# Altium PCB ESP32P4 SOM.PcbDoc (part 2 of 4)
Units mm, origin at the board's own origin, x right, y up, seen from the top; angles counter-clockwise.
Board outline 86.37 x 63.05 mm, 4 copper layers (L1-TOP, L2-GND, L3-GND/PWR, L4-BOT), stack 1.57 mm thick; 203 components, 172 nets, 736 pads, 1001 vias.
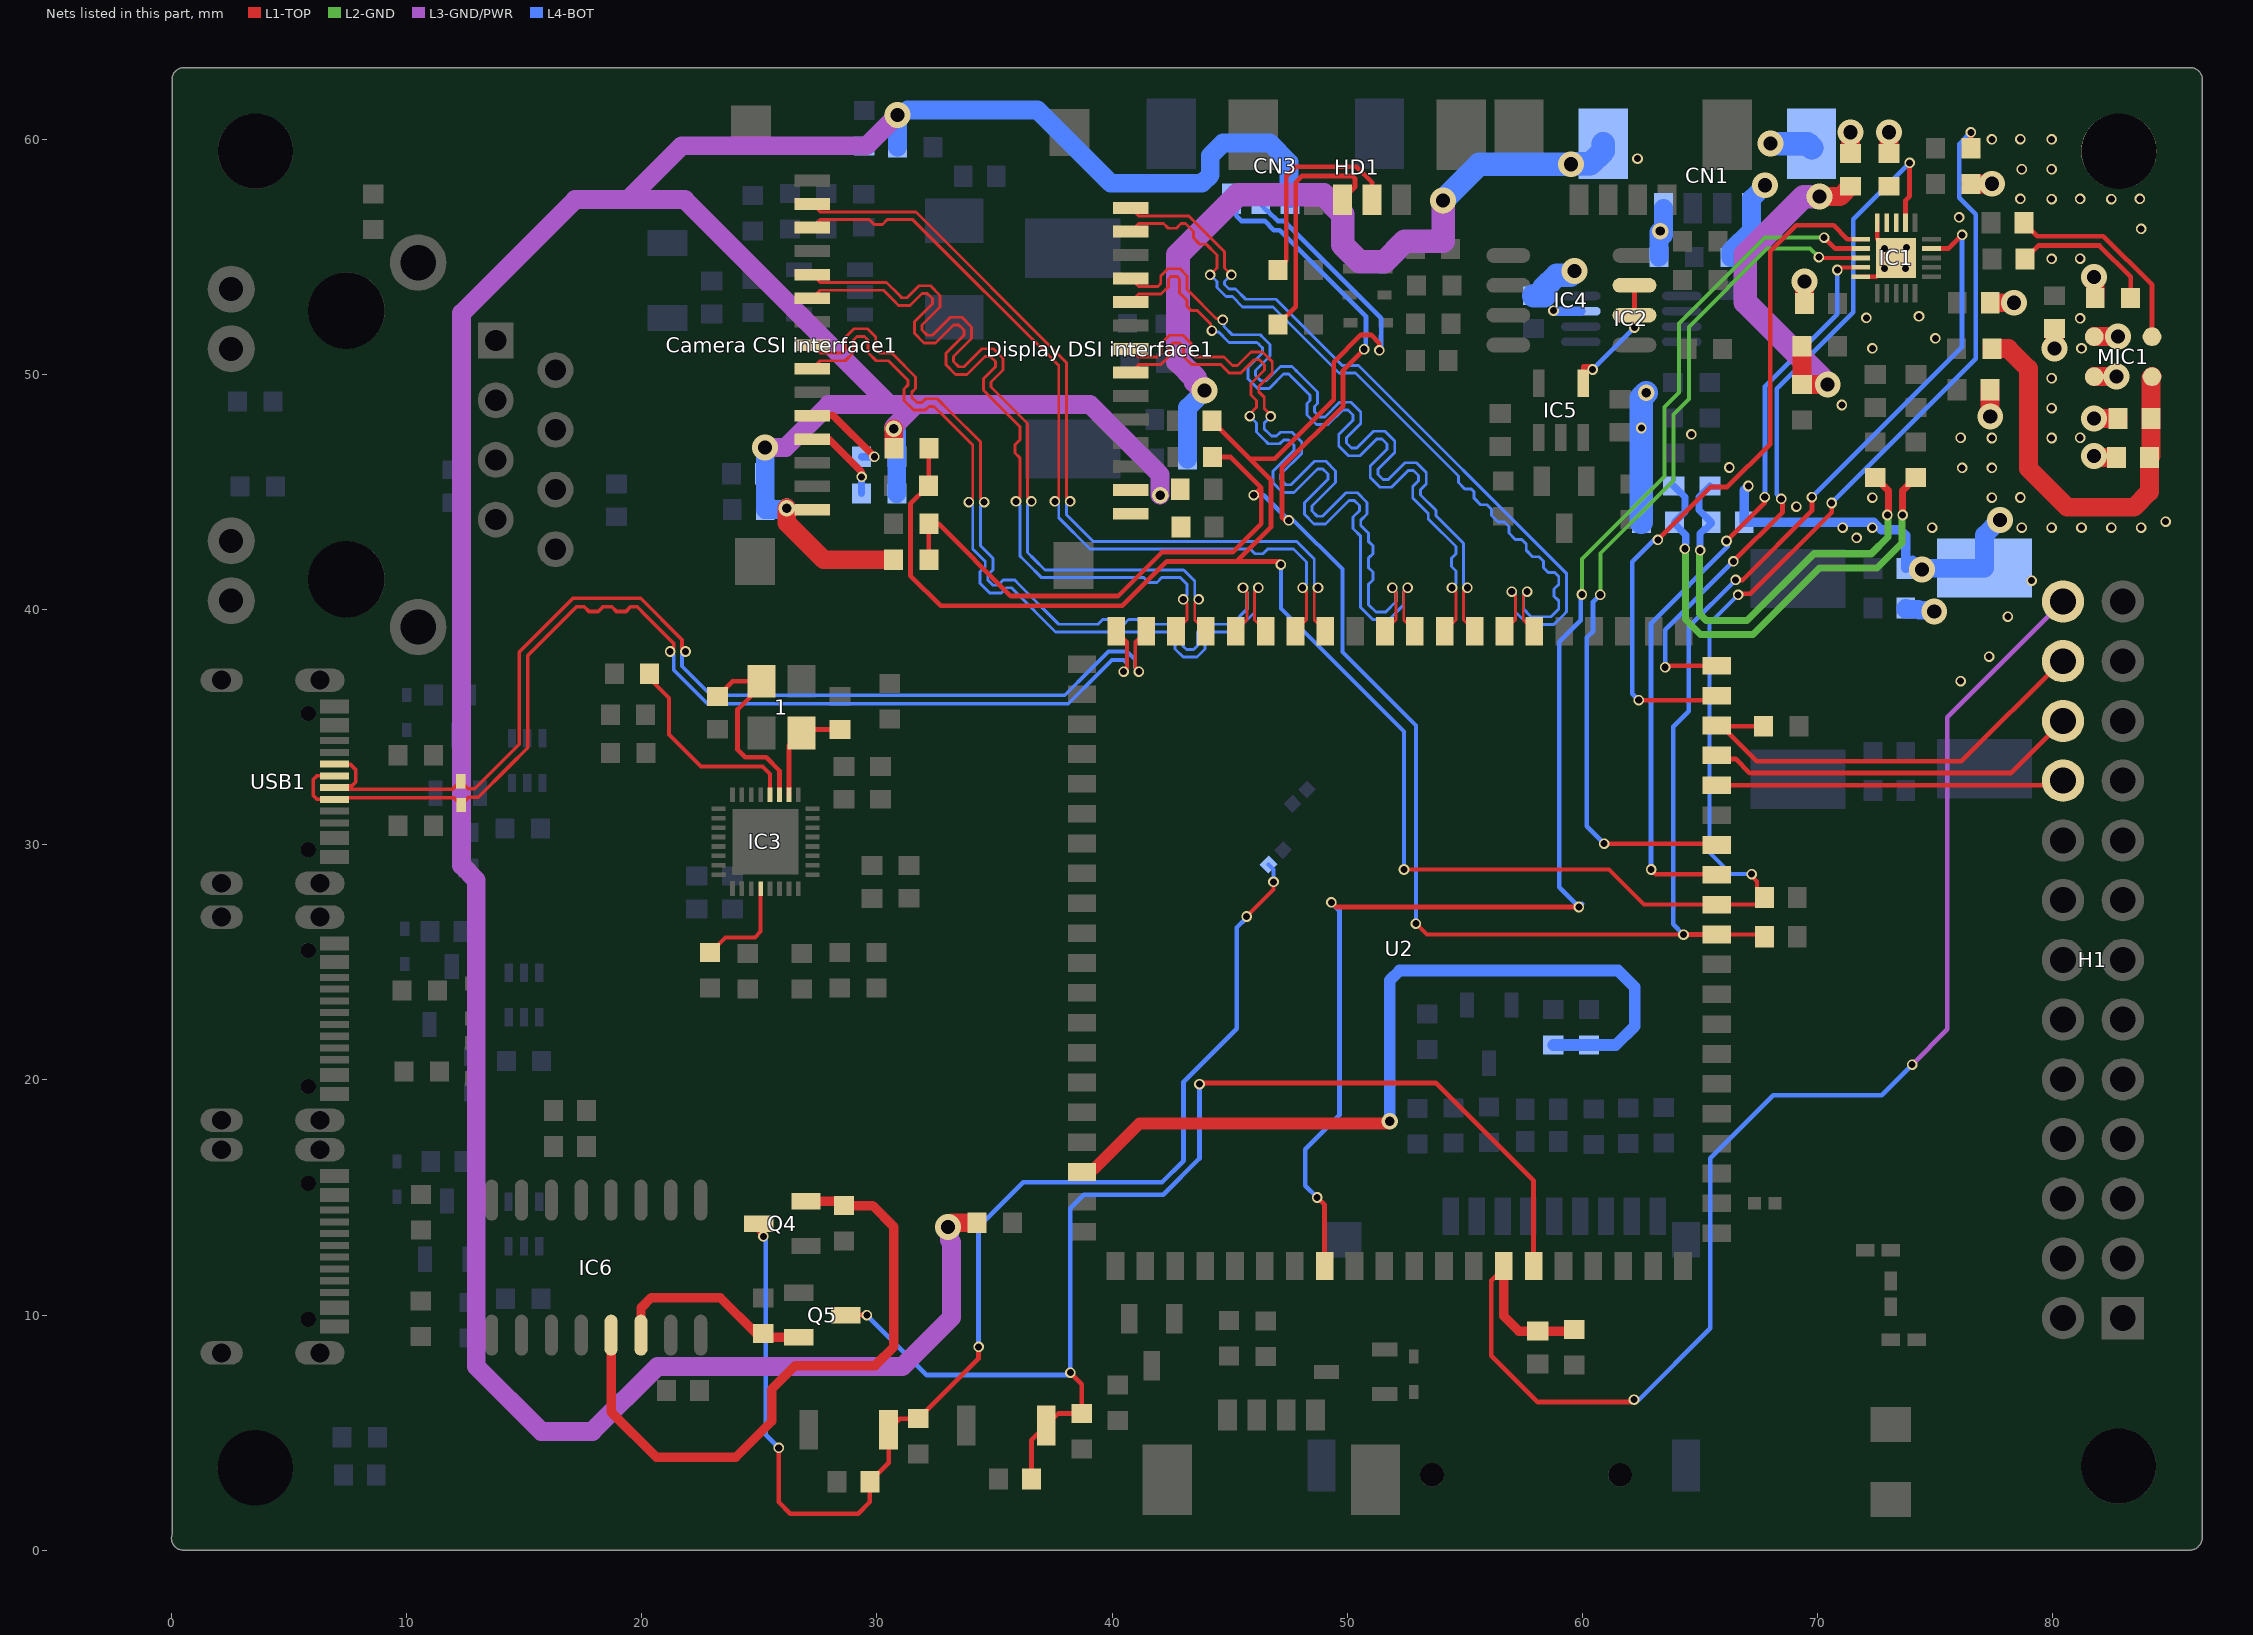
[diagram p4: the nets of this part, all layers, seen from the top]

## Part data
1: library part X322525MOB4SI
ANT1: library part "kinghelm KH-3216-A35", "Ceramic Antenna 5.19dBi 100MHz 2.45GHz 1206 RF Antennas RoHS"
C1 C5: library part CL10A106KP8NNNC, "10V 10uF X5R ±10% 0603 Ceramic Capacitors ROHS"
C2 C15 C17 C36 C37 C49 C50: library part CL10C220JB8NNNC, "50V 22pF C0G ±5% 0603 Ceramic Capacitors RoHS"
C3 C6 C8 C13 C18 C23 C25 C28 C31 C32 C34 C38 C39 C41 C43 C45 C48 C51 C52 C53 C54 C55 C57: library part CC0603KRX7R9BB104, "50V 100nF X7R ±10% 0603 Ceramic Capacitors ROHS"
C4 C9 C11 C24 C29 C30 C33 C35 C40 C42 C44 C56: library part CL10A106MA8NRNC, "25V 10uF X5R ±20% 0603 Ceramic Capacitors ROHS"
C7: library part CL10B102KB8NNNC, "50V 1nF X7R ±10% 0603 Ceramic Capacitors ROHS"
C10 C12 C14 C16 C19 C20 C21 C22 C26 C27 C47 C58 C59 C60: library part CL10B105KA8NNNC, "25V 1uF X7R ±10% 0603 Ceramic Capacitors ROHS"
C46 C61: library part FCC0603N1R0C500CT, "50V 1pF C0G 0603 Ceramic Capacitors RoHS"
"Camera CSI interface1" "Display DSI interface1": library part FPC-1.0FX-15PWCR-H20, "-25℃~+85℃ Hinged Lid 15P 1mm 500mA 50V Bottom Contact Surface Mount, Right Angle SMD,P=1mm,Surface Mount,Right Angle FFC, FPC (Flat Flexible) Connector Assemblies RoHS"
CN1 CN2 CN3 HD1 ZJP1: "4P PicoBlade(MX 1.25) 1x4P Tin -40℃~+105℃ White 1.25mm 125V 4 1A 1 Surface Mount,Vertical SMD,P=1.25mm Headers, Male Pins RoHS"
D1: library part BAT54C_C916424, "600mA 30V 1 Pair Common Cathode 1V@100mA 200mA SOT-23 Single Diodes RoHS"
D2 D3 D4 D5 D6 D7 D8 D9 D11 D12 D13: library part LESD5D5.0CT1G, "9.4A@8/20us 18.6V 7.8V 5V SOD-523 TVS Diodes RoHS"
D10: library part ZMM5V6_C707195, "Zener Diode Independent 5.6V 500mW Surface Mount LL-34"
F1 F2 F3: library part HI3312X101R-10, "4mΩ 100Ω@100MHz SMD,8.5x3.1mm Ferrite Beads and Chips ROHS"
F4 F5: library part 0603-010-24V, "24V 100mA 40A 300mA 900mΩ 0603 PTC Resettable Fuses RoHS"
H1: library part "HX PZ2.54-2X13P ZZ", "26P 2x13P Gold Copper Alloy -40℃~+105℃ Pin Header Black 2.54mm 2.5mm 6mm 1kV 3mm 3A 2 Through Hole 2.54mm Through Hole,P=2.54mm Headers, Male Pins RoHS"
Hole1 Hole2 Hole3 Hole4: library part Pad_Big
IC1: library part ES8311, "1.8V~3.3V QFN-20-EP(3x3) Signal Switches, Multiplexers, Decoders RoHS"
IC2: library part NS4150, "4mA 1-Channel 3Wx1@4Ω Class D MSOP-8 Audio Amplifiers RoHS"
IC3: library part IP101GRI, "Ethernet Transceiver 3.3V QFN-32-EP(4x4) Drivers, Receivers, Transceivers RoHS"
IC4: library part MAX485ESA+T_C41365333, "Transceiver 4.75V~5.25V SOIC-8 Drivers, Receivers, Transceivers RoHS"
IC5: library part TP74LVC1G132S5, "5ns@5V,50pF 10uA 1.65V~5.5V NAND Gate SOT-23-5 Gates and Inverters RoHS"
IC6: library part CH340C, "Transceiver USB 2.0 SOP-16 Interface Controllers RoHS"
L1: library part APH0530T2R2M, "7A 2.2uH Molded Inductor ±20% 7A 29mΩ SMD,5.4x5.2mm Fixed Inductors RoHS"
L2: library part MQG06HF2N2JT7, "700mA 2.2nH ±5% Wirewound Chip Inductor 80mΩ 0603 Fixed Inductors RoHS"
LED1: "20mA 2.3V Red 50mW 0603 LED Indication - Discrete ROHS"
MIC1: "OCLGA-4(3x3.8) MEMS Microphones ROHS"
Q1 Q2 Q6 Q7 Q8: library part AO3407A, "30V 4.3A 48mΩ@10V 2.5V@250uA 1 P-Channel SOT-23 Single FETs, MOSFETs ROHS"
Q3: library part SS8550_C7420371, "300mW 25V 1.5A PNP SOT-23 Single Bipolar Transistors RoHS"
Q4 Q5: library part S8050_C2828466, "300mW 25V 500mA NPN SOT-23 Single Bipolar Transistors RoHS"
Q9 Q10 Q11: library part LMBT3906DW1T1, "40V 150mW 200mA PNP SOT-363 Single Bipolar Transistors RoHS"
R1 R19 R39 R40: library part "RMC 0603 1K J N", "100mW 1kΩ 50V ±100ppm/℃ Thick Film Resistor ±5% 0603 Chip Resistor - Surface Mount ROHS"
R2 R7 R13 R26 R29 R30 R50 R51 R52 R53 R55 R63 R67 R69 R71 R73 R75: library part RC0603FR-0710KL, "100mW 10kΩ 75V ±100ppm/℃ Thick Film Resistor ±1% 0603 Chip Resistor - Surface Mount ROHS"
R3: library part RC0603FR-07100KL, "100mW 100kΩ 75V ±100ppm/℃ Thick Film Resistor ±1% 0603 Chip Resistor - Surface Mount ROHS"
R4 R6 R8: library part RC0603FR-0722KL, "100mW 22kΩ 75V ±100ppm/℃ Thick Film Resistor ±1% 0603 Chip Resistor - Surface Mount RoHS"
R5 R9 R11 R12 R14 R15 R16 R17 R18 R20 R23 R32 R34 R35 R36 R37 R49 R56 R59 R62 R77 R78: library part RC0603JR-070RL, "100mW 0Ω 75V Thick Film Resistor ±5% 0603 Chip Resistor - Surface Mount RoHS"
R10: library part RC0603FR-07100RL, "100mW 100Ω 75V ±100ppm/℃ Thick Film Resistor ±1% 0603 Chip Resistor - Surface Mount ROHS"
R21 R22 R24 R25 R27 R28 R41 R42 R43 R44 R45 R46 R48 R54 R57 R58 R60 R61 R64 R68 R70: library part FRC0603F5101TS, "100mW 5.1kΩ 75V ±100ppm/℃ Thick Film Resistor ±1% 0603 Chip Resistor - Surface Mount RoHS"
R31 R33 R65 R66: library part RC0603FR-072K2L, "100mW 2.2kΩ 75V ±100ppm/℃ Thick Film Resistor ±1% 0603 Chip Resistor - Surface Mount RoHS"
R38: library part RC0603FR-071K5L, "100mW 1.5kΩ 75V ±100ppm/℃ Thick Film Resistor ±1% 0603 Chip Resistor - Surface Mount RoHS"
R47: library part AC0603FR-076K19L, "6.19kΩ 100mW 75V ±100ppm/℃ Thick Film Resistor ±1% 0603 Chip Resistor - Surface Mount RoHS"
R72 R74 R76: library part RC0603FR-07100KL_1RC0603FR-0751KL, "100mW 51kΩ 75V ±100ppm/℃ Thick Film Resistor ±1% 0603 Chip Resistor - Surface Mount RoHS"
R79 R80: library part RC0603FR-071ML, "100mW 1MΩ 75V Thick Film Resistor ±100ppm/℃ ±1% 0603 Chip Resistor - Surface Mount RoHS"
SS: library part HR913550A, "1 With LED Through Hole Modular/Ethernet Connector Jacks With Magnetics RoHS"
SW1 SW2: "12V 2.5mm Round Button 3mm SPST 50mA SMD,3x2.5mm Tactile Switches ROHS"
TF1: library part SH-TF-01A, "-25℃~+85℃ Push-Push 2mm Connector and Ejector MicroSD Card (TF Card) SMD PC Card Sockets RoHS"
U1: "1.5MHz 2A Buck Adjustable 600mV~5.5V 1 SOT-23-5 Voltage Regulators - DC DC Switching Regulators RoHS"
U2: library part JC-ESP32P4-M3
USB1 USB2 USB3: library part GT-USB-7010ASV, "USB 2.0 1 16P -40℃~+85℃ Type-C SMD USB, DVI, HDMI Connector Assemblies RoHS"

## Via types
v1: diameter 0.45, hole 0.3, L1-TOP to L4-BOT, tented both sides, 789 vias
v2: diameter 0.7, hole 0.4, L1-TOP to L4-BOT, tented both sides, 101 vias
v3: diameter 1.1, hole 0.6, L1-TOP to L4-BOT, tented both sides, 75 vias
v4: diameter 0.45, hole 0.3, L1-TOP to L4-BOT, 33 vias
v5: diameter 0.4, hole 0.3, L1-TOP to L4-BOT, tented both sides, 2 vias
v6: diameter 1.1, hole 0.6, L1-TOP to L4-BOT, 1 vias

## Nets (pads, with @x,y where several pads share a name; then routed paths per layer and width w, separated by ;. In a path a pad name is that pad's centre, name@x,y a point inside that pad or via, vN(x,y) a via of type N, cw(c..) or ccw(c..) an arc to the next point about the centre after c; other vN are vias at no path point)
25M_XI: 1.3 C36.1 IC3.2 | length 4.5
  L1-TOP w0.2: IC3.2@26.259,32.129 26.259,34.221 1.3@26.792,34.753 ; 1.3@26.944,34.906 C36.1@28.43,34.906
  L1-TOP w0.204: 1.3@26.792,34.753 1.3@26.944,34.906
25M_XO: 1.1 C37.1 IC3.3 | length 8.6
  L1-TOP w0.2: 1.1@25.092,36.953 25.092,36.769 24.076,35.754 24.076,34.044 24.403,33.717 25.292,33.717 25.859,33.15 IC3.3@25.859,32.129
  L1-TOP w0.204: C37.1@23.219,36.311 23.861,36.953 1.1@25.092,36.953
ADC_MIC1_N: C14.1 R15.2 | length 6.2
  L1-TOP w0.2: C14.1@78.826,54.913 79.395,55.482 81.992,55.482 83.321,54.153 R15.2@83.321,53.255
ADC_MIC1_P: C12.2 MIC1.4 | length 8.7
  L1-TOP w0.2: C12.2@78.783,56.451 79.352,55.882 82.158,55.882 84.229,53.81 MIC1.4@84.229,51.61
ADC_MICBIAS12: C28.2 C29.2 MIC1.1 R9.2 | length 17.2
  L1-TOP w0.8: R9.2@77.419,51.1 78.124,51.1 78.972,50.252 78.972,46.004 80.62,44.356 83.468,44.356 84.118,45.006 C29.2@84.118,46.469 84.186,46.537 C28.2@84.186,48.125 84.186,49.867 MIC1.1@84.229,49.91
AGND: C1.1 C3.1 C10.2 C11.1 C15.1 C16.1 C17.2 C19.1 C20.1 C23.1 C24.1 C25.1 C26.1 C27.2 C28.1 C29.1 CN1.1 CN1.4 CN1.5 CN1.6 F2.2 Hole3.1 IC1.5 IC1.10 IC1.21 IC2.7 MIC1.2 MIC1.3 R7.1 R13.1 R15.1 | length 82.2
  L1-TOP w0.2: IC1.10@71.846,54.155 72.492,54.155 v4(72.85,54.513) ; IC1.5@72.546,56.455 72.546,55.755 IC1.21@72.898,55.404 ; v4(72.85,55.355) 72.946,55.355 IC1.21@73.346,54.955
  L1-TOP w0.8: C27.2@69.453,53.019 v3(69.453,53.958) ; C23.1@71.4,59.402 v3(71.4,60.304) ; C24.1@73.046,59.402 v3(73.046,60.304) ; R7.1@76.528,58.102 77.418,58.102 v3(77.427,58.111) ; C20.1@77.336,49.35 77.336,48.227 v3(77.348,48.215) ; C19.1@77.348,53.05 v3(78.364,53.05) ; v3(80.076,51.1) C16.1@80.076,51.95 ; v3(81.769,46.537) 81.837,46.469 C29.1@82.718,46.469 ; v3(81.769,48.125) C28.1@82.786,48.125 ; MIC1.2@81.769,49.91 v3(82.718,49.91) ; MIC1.3@81.769,51.61 v3(82.786,51.61) ; v3(81.769,54.153) 81.815,54.107 R15.1@81.815,53.255
  L3-GND/PWR w1: v3(43.938,49.316) 43.546,49.708 43.546,49.834 42.814,50.566 42.806,50.566 42.806,55.093 45.353,57.64 48.99,57.64 49.806,56.824 49.806,55.522 50.538,54.79 51.574,54.79 52.444,55.66 54.084,55.66 v3(54.084,57.407)
  L4-BOT w0.4: v1(58.776,52.714) 58.801,52.689 59.301,52.689 IC2.7@59.939,52.689 ; v1(67.063,45.258) 66.876,45.071 66.876,45 66.886,44.99 C17.2@66.886,43.715 72.34,43.715 72.395,43.715 72.712,43.398 73.524,43.398 73.758,43.164 C10.2@73.758,41.756 ; C10.2@74.054,42.103 v3(74.444,41.713)
  L4-BOT w0.8: C1.1@43.216,46.407 C3.1@43.216,48.082 43.216,48.594 v3(43.938,49.316) ; R13.1@63.255,54.998 63.259,55.001 63.259,56.052 v2(63.308,56.101) ; v2@63.449,55.929 CN1.1@63.449,57.069 ; C26.1@66.318,54.973 66.318,55.263 67.199,56.144 CN1.4@67.199,57.069 67.199,57.483 v3(67.763,58.047) ; C11.1@73.758,40.063 73.758,40.013 74.288,40.013 74.323,39.978 74.908,39.978 v3(74.966,39.92) ; v3@74.488,41.756 77.092,41.756 F2.2@77.105,41.769 77.105,43.169 77.742,43.806 v3(77.76,43.806)
  L4-BOT w1: v3(54.084,57.407) 55.617,58.94 v3(59.516,58.94) 59.535,58.959 60.349,58.959 60.899,59.509 CN1.6@60.899,59.819 ; C25.1@57.926,53.35 58.393,53.35 58.393,53.705 58.909,54.221 59.497,54.221 v3(59.676,54.4) ; C15.1@62.515,43.715 v1(62.515,47.726) 62.515,49.017 v2(62.728,49.229) ; v3(68.004,59.819) 69.577,59.819 CN1.5@69.749,59.647
  other v1: 76.09,36.96 77.3,38 78.1,39.7 79.111,41.23 71.668,43.049 71.07,43.49 72.34,43.49 74.88,43.49 78.69,43.49 79.96,43.49 81.23,43.49 82.5,43.49 83.77,43.49 84.808,43.741 69.108,44.381 72.34,44.76 77.42,44.76 78.631,44.77 66.254,46.047 76.15,46.03 77.42,46.03 76.091,47.31 77.42,47.3 79.96,47.3 81.171,47.31 64.643,47.451 79.96,48.57 71.035,48.701 79.96,49.84 72.34,51.11 81.23,51.11 75.016,51.539 81.171,52.39 72.078,52.406 74.318,52.474 79.96,54.92 81.171,54.93 83.77,56.19 76.026,56.68 78.631,57.47 79.96,57.46 81.171,57.47 82.5,57.46 83.711,57.47 78.69,58.73 79.96,58.73 62.349,59.178 77.42,60 78.631,60.01 79.96,60
  other v4: 73.746,54.513 73.786,55.404
Ao: F5.2 HD1.2 | length 9
  L1-TOP w0.2: F5.2@47.059,54.447 47.059,54.483 47.414,54.838 47.414,58.44 47.814,58.84 50.395,58.84 51.057,58.178 HD1.2@51.057,57.44
Bo: F4.2 HD1.3 | length 10.1
  L1-TOP w0.2: F4.2@47.059,52.129 47.814,52.884 47.814,58.178 48.076,58.44 50.23,58.44 50.331,58.339 50.331,57.964 HD1.3@49.807,57.44
BOOTMODE: C51.1 Q4.3 R53.1 R77.2 SW2.2 | length 54.9
  L1-TOP w0.17: v1(45.726,26.95) 46.866,28.09 v1(46.866,28.422) v1@46.919,28.475
  L1-TOP w0.2: Q4.3@24.984,13.887 24.866,13.769 24.866,13.66 v1(25.176,13.35) ; v1(25.826,4.35) 25.826,2.05 26.326,1.55 29.202,1.55 29.702,2.05 C51.1@29.702,2.912 30.499,3.709 SW2.2@30.499,5.122 30.97,5.593 R53.1@31.766,5.593 34.326,8.153 v1(34.326,8.65)
  L4-BOT w0.17: v1@45.726,26.9 v1(45.726,26.95) ; R77.2@46.659,29.157 46.866,28.95 v1(46.866,28.422)
  L4-BOT w0.2: v1(25.176,13.35) 25.276,13.25 25.276,4.9 v1(25.826,4.35) ; v1(34.326,8.65) 34.326,13.75 36.226,15.65 42.126,15.65 43.042,16.566 43.042,19.914 45.308,22.18 45.308,26.482 v1@45.726,26.9
C6_CHIP_PU: C47.2 H1.26 R51.1 U2.74 | length 60.6
  L1-TOP w0.2: U2.74@56.66,12.082 56.66,11.996 56.133,11.469 56.133,8.267 58.1,6.3 62.096,6.3 v1(62.2,6.404)
  L1-TOP w0.4: U2.74@56.66,11.996 56.66,9.96 57.301,9.319 C47.2@58.105,9.319 59.585,9.319 R51.1@59.654,9.388
  L3-GND/PWR w0.2: v1(74.026,20.65) 75.526,22.15 75.526,35.427 H1.26@80.447,40.348
  L4-BOT w0.2: v1(62.2,6.404) 62.412,6.404 65.441,9.433 65.441,16.667 68.124,19.35 72.726,19.35 v1(74.026,20.65)
C6_IO9: H1.24 R54.1 U2.18 | length 18.9
  L1-TOP w0.2: U2.18@65.72,35.072 65.904,35.072 U2.18@65.937,35.039 ; R54.1@67.702,35.039 U2.18@65.937,35.039 ; H1.24@80.447,37.808 80.384,37.808 76.126,33.55 67.426,33.55 U2.18@65.937,35.039
C6_U0RXD: H1.20 U2.16 | length 14.8
  L1-TOP w0.2: U2.16@65.72,32.532 80.252,32.532 H1.20@80.447,32.728
C6_U0TXD: H1.22 U2.17 | length 16
  L1-TOP w0.2: U2.17@65.72,33.802 65.873,33.65 66.526,33.65 67.126,33.05 78.229,33.05 H1.22@80.447,35.268
CHIP_PU: C48.1 Q5.3 R52.1 SW1.2 U2.75 | length 53
  L1-TOP w0.2: Q5.3@28.68,9.998 v1(29.578,9.998) ; C48.1@36.573,3.03 36.573,4.673 SW1.2@37.2,5.3 37.713,5.813 R52.1@38.716,5.813 38.716,7.06 v1(38.226,7.55) ; v1(43.721,19.817) 43.721,19.871 53.773,19.871 57.926,15.718 57.926,12.087 U2.75@57.93,12.082
  L4-BOT w0.2: v1(29.578,9.998) 32.126,7.45 38.126,7.45 v1(38.226,7.55) 38.226,14.55 38.798,15.122 42.182,15.122 43.721,16.661 v1(43.721,19.817)
CODEC_3V3: C23.2 C24.2 IC1.3 IC1.4 R14.2 R16.2 | length 15.3
  L1-TOP w0.8: R14.2@69.346,51.198 R16.2@69.346,49.575 v3(70.436,49.575) ; v3(70.094,57.569) 70.966,57.569 C23.2@71.4,58.002
  L3-GND/PWR w1: v3(70.094,57.569) 69.421,57.569 66.938,55.086 66.938,53.073 v3(70.436,49.575)
CODEC_I2S0_DSDIN: IC1.9 U2.13 | length 32.8
  L1-TOP w0.17: v1(70.846,54.445) 70.951,54.551 71.841,54.551 IC1.9@71.846,54.555
  L1-TOP w0.2: v1(62.926,28.947) 63.123,28.75 65.693,28.75 U2.13@65.72,28.722 ; v1(66.132,42.918) 66.132,42.92 66.142,42.92 67.76,44.538 v1(67.76,44.787)
  L4-BOT w0.2: v1(62.926,28.947) 62.926,39.426 66.186,42.686 66.186,42.864 v1(66.132,42.918) ; v1(67.76,44.787) 67.772,44.798 67.772,49.496 70.846,52.57 v1(70.846,54.445)
CODEC_I2S0_LRCK: IC1.8 U2.14 | length 37.8
  L1-TOP w0.17: v1(70.058,54.991) 70.094,54.955 IC1.8@71.846,54.955
  L1-TOP w0.2: v1(60.764,40.633) v1@60.773,40.642 ; v1(60.926,30.05) 65.663,30.05 U2.14@65.72,29.992
  L2-GND w0.17: v1(60.764,40.633) 60.764,42.383 63.875,45.493 63.875,48.306 64.53,48.961 64.53,52.03 67.855,55.355 69.694,55.355 v1(70.058,54.991)
  L4-BOT w0.2: v1@60.764,40.566 v1(60.764,40.633) 60.457,40.327 60.457,39.083 60.189,38.815 60.189,30.787 v1(60.926,30.05)
CODEC_I2S0_MCLK: IC1.2 U2.20 | length 30.8
  L1-TOP w0.2: v1(63.526,37.55) 63.588,37.612 U2.20@65.72,37.612 ; v1(66.426,42.05) 68.518,44.142 68.518,44.639 68.462,44.695 v1(68.462,44.714) ; IC1.2@73.746,56.455 73.746,57.411 73.918,57.583 v1@73.918,58.999
  L4-BOT w0.2: v1(63.526,37.55) 63.526,39.15 v1(66.426,42.05) ; v1(68.462,44.714) 68.272,44.905 68.272,49.396 71.525,52.649 71.525,56.606 v1(73.921,59.002)
CODEC_I2S0_SCLK: IC1.6 U2.19 | length 30.2
  L1-TOP w0.2: v1(62.401,36.15) 65.528,36.15 U2.19@65.72,36.342 ; v1(63.215,42.964) 65.468,45.217 66.167,45.217 67.99,47.04 67.99,55.241 69.093,56.344 70.686,56.344 71.275,55.755 IC1.6@71.846,55.755
  L4-BOT w0.2: v1(62.401,36.15) 62.123,36.428 62.123,42.033 63.126,43.035 63.144,43.035 v1(63.215,42.964)
COL: IC3.4 R41.1 | length 8.9
  L1-TOP w0.17: R41.1@20.112,37.293 21.166,36.239 21.166,34.689 22.522,33.332 25.133,33.332 25.431,33.034 ; 25.431,33.033 25.459,33.005 IC3.4@25.459,32.129
CRS: IC3.20 R44.1 | length 4.4
  L1-TOP w0.17: R44.1@22.903,25.416 23.552,26.065 24.822,26.065 25.059,26.302 IC3.20@25.059,28.129
CSI_A_CLK_N: "Camera CSI interface1.8" U2.36 | length 34.8
  L1-TOP w0.122: 27.253,51.247 27.591,50.91 28.366,50.91 28.523,50.91 28.678,51.065 28.678,51.599 29.024,51.944 29.604,51.944 29.95,51.599 29.95,51.065 30.106,50.91 30.496,50.91 30.63,50.91 30.766,50.774 31.642,49.898 31.642,49.409 31.481,49.248 31.481,49.028 31.701,48.808 31.921,48.808 32.081,48.969 32.571,48.969 33.114,48.426 34.402,47.138 34.402,44.731 v1(34.564,44.569) ; U2.36@45.26,39.082 45.733,39.555 45.733,40.768 v1(45.57,40.93)
  L4-BOT w0.122: v1(34.564,44.569) 34.402,44.406 34.402,42.715 34.585,42.532 34.935,42.183 34.935,41.694 34.716,41.475 34.716,41.255 34.936,41.035 35.156,41.035 35.374,41.254 35.863,41.254 36.069,41.048 37.736,39.381 39.345,39.381 39.406,39.381 39.606,39.581 39.956,39.581 40.156,39.381 40.506,39.381 40.706,39.581 41.056,39.581 41.256,39.381 41.423,39.381 42.66,39.381 43.006,39.035 43.006,38.46 43.162,38.304 43.473,38.304 43.628,38.46 43.628,39.035 43.974,39.381 44.504,39.381 45.099,39.381 45.733,40.015 45.733,40.726 45.731,40.727 45.731,40.769 v1(45.57,40.93)
CSI_A_CLK_P: "Camera CSI interface1.9" U2.35 | length 35
  L1-TOP w0.122: 27.253,50.247 27.591,50.585 28.366,50.585 28.657,50.585 29.003,50.931 29.003,51.464 29.159,51.619 29.47,51.619 29.625,51.464 29.625,50.931 29.971,50.585 30.496,50.585 30.536,50.544 31.317,49.764 31.317,49.544 31.156,49.383 31.156,48.894 31.566,48.483 32.055,48.483 32.216,48.644 32.436,48.644 32.884,48.196 34.077,47.003 34.077,44.731 v1(33.914,44.569) ; v1(46.22,40.93) 46.058,40.768 46.058,39.555 U2.35@46.53,39.082
  L4-BOT w0.122: v1(33.914,44.569) 34.077,44.406 34.077,42.581 34.356,42.302 34.61,42.048 34.61,41.828 34.391,41.61 34.391,41.121 34.801,40.71 35.29,40.71 35.509,40.929 35.729,40.929 35.839,40.818 37.602,39.056 41.423,39.056 42.526,39.056 42.681,38.901 42.681,38.325 43.027,37.979 43.607,37.979 43.953,38.325 43.953,38.901 44.109,39.056 44.504,39.056 45.234,39.056 46.058,39.88 46.058,40.768 v1(46.22,40.93)
CSI_A_DATA0_N: "Camera CSI interface1.2" U2.33 | length 34.9
  L1-TOP w0.122: 27.253,57.247 27.591,56.91 31.66,56.91 38.057,50.512 38.057,44.87 38.057,44.769 v1(38.22,44.607) ; v1(48.76,40.93) 48.598,40.767 48.598,39.555 U2.33@49.07,39.082
  L4-BOT w0.122: v1(38.22,44.607) 38.057,44.444 38.057,44.043 39.2,42.9 47.856,42.9 48.598,42.158 48.598,41.093 v1(48.76,40.93)
CSI_A_DATA0_P: "Camera CSI interface1.3" U2.34 | length 34.7
  L1-TOP w0.122: 27.253,56.247 27.591,56.585 29.625,56.585 29.686,56.585 29.886,56.385 30.236,56.385 30.436,56.585 31.28,56.585 31.525,56.585 37.732,50.378 37.732,44.87 37.732,44.769 v1(37.57,44.607) ; U2.34@47.8,39.082 48.273,39.555 48.273,40.768 v1(48.11,40.93)
  L4-BOT w0.122: v1(37.57,44.607) 37.732,44.444 37.732,43.908 39.065,42.575 45.815,42.575 45.876,42.575 46.076,42.375 46.426,42.375 46.626,42.575 47.69,42.575 47.722,42.575 48.273,42.024 48.273,41.093 v1(48.11,40.93)
CSI_A_DATA1_N: "Camera CSI interface1.5" U2.37 | length 34.5
  L1-TOP w0.122: 27.253,54.247 27.591,53.91 30.416,53.91 30.949,53.376 31.06,53.266 31.28,53.266 31.786,53.772 32.275,53.772 32.685,53.362 32.685,52.872 31.92,52.108 31.92,51.888 32.14,51.668 32.36,51.668 33.125,52.433 33.614,52.433 34.024,52.022 34.024,51.533 33.26,50.768 33.26,50.548 33.479,50.329 33.699,50.329 34.464,51.093 34.953,51.093 35.364,50.683 35.364,50.194 34.858,49.688 34.858,49.468 36.113,48.213 36.404,47.921 36.404,44.769 v1(36.567,44.607)
  L1-TOP w0.124: v1(43.68,40.44) 43.519,40.278 43.519,39.554 U2.37@43.99,39.082
  L4-BOT w0.122: v1(36.567,44.607) 36.404,44.444 36.404,42.429 36.694,42.14
  L4-BOT w0.124: 36.694,42.14 37.147,41.687 43.047,41.687 43.519,41.215 43.519,40.608 43.519,40.602 v1(43.68,40.44)
CSI_A_DATA1_P: "Camera CSI interface1.6" U2.38 | length 34.3
  L1-TOP w0.122: 27.253,53.247 27.591,53.585 30.281,53.585 30.72,53.146 30.925,52.941 31.414,52.941 31.92,53.447 32.14,53.447 32.36,53.227 32.36,53.007 31.595,52.242 31.595,51.753 32.006,51.343 32.495,51.343 33.26,52.108 33.48,52.108 33.699,51.888 33.699,51.668 32.935,50.903 32.935,50.414 33.345,50.004 33.834,50.004 34.599,50.768 34.819,50.768 35.039,50.549 35.039,50.329 34.533,49.823 34.533,49.333 35.883,47.983 36.079,47.787 36.079,47.273 36.079,47.212 35.879,47.012 35.879,46.662 36.079,46.462 36.079,46.34 36.079,44.769 v1(35.917,44.607)
  L1-TOP w0.124: U2.38@42.72,39.082 43.192,39.554 43.192,40.279 v1(43.03,40.44)
  L4-BOT w0.122: v1(35.917,44.607) 36.079,44.444 36.079,42.295 36.242,42.132
  L4-BOT w0.124: 36.241,42.132 36.367,42.006 36.367,42.004 37.011,41.36 41.296,41.36 41.358,41.36 41.558,41.16 41.908,41.16 42.108,41.36 42.532,41.36 42.912,41.36 43.192,41.08 43.192,40.608 43.192,40.602 v1(43.03,40.44)
CSI_IO0: "Camera CSI interface1.11" R29.2 | length 3.9
  L1-TOP w0.3: 27.253,48.247 28.147,48.247 v1(29.892,46.502)
  L4-BOT w0.3: R29.2@29.34,46.502 v1(29.892,46.502)
CSI_IO1: "Camera CSI interface1.12" R30.2 | length 3.6
  L1-TOP w0.3: 27.253,47.247 27.966,47.247 29.351,45.862 v1(29.351,45.645)
  L4-BOT w0.3: R30.2@29.34,44.942 29.34,45.634 v1(29.351,45.645)
DAC_OUT_N: C13.1 C15.2 R11.2 | length 20.4
  L1-TOP w0.3: v1(64.363,42.59) v1@64.386,42.567 ; v1(73.621,44.023) 73.621,45.056 R11.2@74.185,45.621
  L2-GND w0.3: v1(64.363,42.59) 64.386,42.567 64.386,39.576 65.022,38.939 67.258,38.939 70.095,41.777 72.537,41.777 73.596,42.835 73.596,43.998 v1(73.621,44.023)
  L4-BOT w0.3: C13.1@63.89,45.258 64.363,44.786 64.363,44.163 C15.2@63.915,43.715 63.915,43.665 64.401,43.18 64.401,42.815 64.392,42.806 64.392,42.619 v1(64.363,42.59)
DAC_OUT_P: C17.1 C18.1 R12.2 | length 18.5
  L1-TOP w0.3: v1@64.986,42.497 v1(65.009,42.52) ; R12.2@72.456,45.621 73.021,45.056 73.021,44.073 v1(72.971,44.023)
  L2-GND w0.3: v1(65.009,42.52) 64.986,42.497 64.986,39.824 65.271,39.539 67.009,39.539 69.847,42.377 72.289,42.377 72.996,43.083 72.996,43.998 v1(72.971,44.023)
  L4-BOT w0.3: v1(65.009,42.52) 65.001,42.528 65.001,43.24 65.177,43.415 65.237,43.415 65.487,43.665 C17.1@65.487,43.715 64.963,44.239 64.963,44.786 C18.1@65.435,45.258
DSI_A_CLK_N: "Display DSI interface1.5" U2.28 | length 33.2
  L1-TOP w0.122: 40.796,54.083 41.133,53.746 41.799,53.746 41.955,53.746 42.073,53.864 42.073,54.192 42.381,54.5 42.886,54.5 43.195,54.192 43.195,53.611 43.261,53.545 44.428,52.378 44.658,52.378 v1(44.709,52.326) ; v1(55.11,40.93) 54.948,40.768 54.948,39.555 U2.28@55.42,39.082
  L4-BOT w0.122: v1(44.709,52.326) 44.761,52.275 44.761,52.045 45.116,51.69 46.306,51.69 46.46,51.536 46.571,51.425 46.721,51.275 46.721,50.786 46.109,50.174 46.109,49.954 46.329,49.735 46.549,49.735 47.161,50.346 47.65,50.346 47.745,50.251 47.855,50.141 47.868,50.128 48.743,49.253 48.743,48.764 48.616,48.637 48.616,48.417 48.836,48.197 49.056,48.197 49.68,48.821 50.169,48.821 50.579,48.411 50.579,47.922 49.968,47.311 49.968,47.091 50.188,46.871 50.408,46.871 51.124,47.587 51.613,47.587 52.023,47.176 52.023,46.687 51.308,45.972 51.308,45.752 51.528,45.532 51.748,45.532 52.463,46.247 52.952,46.247 53.363,45.837 53.363,45.348 53.115,45.101 53.115,44.881 53.772,44.224 53.772,44.093 53.772,43.996 54.948,42.82 54.948,41.093 v1(55.11,40.93)
DSI_A_CLK_P: "Display DSI interface1.6" U2.29 | length 33
  L1-TOP w0.122: 40.796,53.083 41.133,53.421 41.799,53.421 42.089,53.421 42.398,53.729 42.398,54.057 42.516,54.175 42.752,54.175 42.87,54.057 42.87,53.477 43.187,53.16 43.187,52.901 43.367,52.721 43.626,52.721 44.198,52.148 44.198,51.918 v1(44.25,51.867) ; U2.29@54.15,39.082 54.623,39.555 54.623,40.768 v1(54.46,40.93)
  L4-BOT w0.122: v1(44.25,51.867) 44.301,51.815 44.531,51.815 44.981,51.365 46.171,51.365 46.231,51.306 46.341,51.195 46.396,51.141 46.396,50.921 45.784,50.309 45.784,49.82 46.194,49.41 46.683,49.41 47.295,50.021 47.515,50.021 47.626,49.911 47.638,49.898 47.721,49.816 48.418,49.118 48.418,48.898 48.291,48.771 48.291,48.282 48.701,47.872 49.19,47.872 49.815,48.496 50.035,48.496 50.254,48.276 50.254,48.056 49.643,47.445 49.643,46.956 50.054,46.546 50.543,46.546 51.259,47.262 51.479,47.262 51.698,47.042 51.698,46.822 50.983,46.106 50.983,45.617 51.393,45.207 51.882,45.207 52.598,45.922 52.818,45.922 53.038,45.703 53.038,45.483 52.79,45.235 52.79,44.746 53.447,44.089 53.447,43.861 53.494,43.814 54.623,42.686 54.623,42.375 54.432,42.184 54.432,41.834 54.623,41.643 54.623,41.093 v1(54.46,40.93)
DSI_A_DATA0_N: "Display DSI interface1.8" U2.31 | length 32.7
  L1-TOP w0.122: 40.796,51.083 41.133,50.746 41.784,50.746 41.94,50.746 42.095,50.901 42.095,51.324 42.441,51.67 43.021,51.67 43.367,51.324 43.367,50.901 43.523,50.746 44.006,50.746 44.76,50.746 45.013,50.493 45.123,50.383 45.343,50.383 45.914,50.954 46.403,50.954 46.814,50.544 46.814,50.055 46.242,49.483 46.242,49.264 46.389,49.117 46.472,49.034 46.472,48.554 46.747,48.279 v1(46.747,48.218) ; U2.31@51.61,39.082 52.083,39.555 52.083,40.768 v1(51.92,40.93)
  L4-BOT w0.122: v1(46.747,48.218) 46.472,47.943 46.472,47.687 46.671,47.489 46.781,47.378 47.001,47.378 47.168,47.545 47.657,47.545 48.068,47.135 48.068,46.646 47.17,45.749 47.17,45.529 47.39,45.309 47.61,45.309 48.61,46.309 49.1,46.309 49.51,45.899 49.51,45.41 48.51,44.41 48.51,44.19 48.729,43.97 48.949,43.97 49.95,44.97 50.439,44.97 50.849,44.56 50.849,44.071 50.579,43.8 50.579,43.58 50.9,43.259 50.9,42.929 50.9,42.91 51.093,42.717 51.093,42.375 50.9,42.182 50.9,41.792 51.093,41.599 51.093,41.257 50.9,41.064 50.9,40.22 51.22,39.9 51.641,39.9 52.083,40.342 52.083,40.768 v1(51.92,40.93)
DSI_A_DATA0_P: "Display DSI interface1.9" U2.30 | length 32.9
  L1-TOP w0.122: 40.796,50.083 41.133,50.421 41.784,50.421 42.074,50.421 42.42,50.767 42.42,51.189 42.576,51.345 42.887,51.345 43.042,51.189 43.042,50.767 43.388,50.421 44.006,50.421 44.626,50.421 44.783,50.264 44.989,50.058 45.478,50.058 46.049,50.629 46.269,50.629 46.489,50.409 46.489,50.189 45.917,49.618 45.917,49.129 46.147,48.899 46.147,48.875 46.147,48.606 45.859,48.318 v1(45.859,48.23) ; v1(52.57,40.93) 52.408,40.768 52.408,39.555 U2.30@52.88,39.082
  L4-BOT w0.122: v1(45.859,48.23) 46.147,47.943 46.147,47.553 46.441,47.259 46.646,47.053 47.136,47.053 47.303,47.22 47.523,47.22 47.743,47.001 47.743,46.781 46.845,45.883 46.845,45.394 47.256,44.984 47.745,44.984 48.745,45.984 48.965,45.984 49.185,45.764 49.185,45.545 48.185,44.544 48.185,44.055 48.595,43.645 49.084,43.645 50.084,44.645 50.304,44.645 50.524,44.425 50.524,44.205 50.254,43.935 50.254,43.446 50.575,43.125 50.575,42.604 50.575,40.085 51.085,39.575 51.776,39.575 52.408,40.207 52.408,40.768 v1(52.57,40.93)
DSI_A_DATA1_N: "Display DSI interface1.2" U2.27 | length 33.2
  L1-TOP w0.122: 40.796,57.083 41.133,56.746 43.261,56.746 44.788,55.218 44.788,54.528 v1(45.076,54.24) ; U2.27@56.69,39.082 57.163,39.555 57.163,40.605 v1(57,40.768)
  L4-BOT w0.122: v1(45.076,54.24) 44.788,53.952 44.788,53.83 44.981,53.637 45.252,53.637 45.69,53.2 46.976,53.2 49.792,50.384 50.485,50.384 59.321,41.548 59.321,39.895 59.226,39.8 58.801,39.375 57.688,39.375 57.163,39.9 57.163,40.642 57.038,40.768 v1(57,40.768)
DSI_A_DATA1_P: "Display DSI interface1.3" U2.26 | length 33
  L1-TOP w0.122: 40.796,56.083 41.133,56.421 42.13,56.421 42.191,56.421 42.391,56.221 42.741,56.221 42.941,56.421 43.057,56.421 43.126,56.421 43.46,56.086 43.46,55.814 43.735,55.539 44.007,55.539 44.463,55.083 44.463,54.528 v1(44.176,54.24) ; v1(57.65,40.768) 57.488,40.605 57.488,39.555 U2.26@57.96,39.082
  L4-BOT w0.122: v1(44.176,54.24) 44.463,53.952 44.463,53.695 44.847,53.312 45.118,53.312 45.555,52.875 46.841,52.875 49.657,50.059 50.35,50.059 54.73,45.679 54.73,45.406 55.005,45.132 55.278,45.132 55.402,45.008 55.402,44.735 55.676,44.461 55.949,44.461 56.139,44.27 56.139,43.997 56.413,43.723 56.686,43.723 56.877,43.533 56.877,43.26 57.151,42.986 57.424,42.986 57.614,42.795 57.614,42.522 57.888,42.248 58.161,42.248 58.352,42.057 58.352,41.785 58.564,41.572 58.837,41.572 58.996,41.413 58.996,41.067 58.801,40.872 58.801,40.571 58.996,40.376 58.996,40.03 58.666,39.7 57.823,39.7 57.488,40.035 57.488,40.642 57.613,40.768 v1(57.65,40.768)
DTR: IC6.13 Q4.2 R69.1 | length 28.1
  L1-TOP w0.4: IC6.13@18.697,9.143 18.697,5.879 20.626,3.95 23.994,3.95 25.526,5.482 25.526,6.85 26.526,7.85 29.926,7.85 30.726,8.65 30.726,13.75 29.823,14.653 R69.1@28.6,14.653 28.417,14.837 Q4.2@26.984,14.837
DTS: IC6.14 Q5.2 R67.1 | length 8.8
  L1-TOP w0.4: IC6.14@19.967,9.143 19.967,10.306 20.396,10.735 23.341,10.735 24.866,9.21 R67.1@25.167,9.21 25.328,9.048 Q5.2@26.68,9.048
EN: IC4.2 IC4.3 IC5.4 | length 5.5
  L1-TOP w0.2: IC5.4@60.043,49.632 60.043,50.342 60.346,50.342 60.458,50.229 60.44,50.211 v1(60.438,50.214) ; v1(62.219,51.995) 62.219,52.52 IC4.2@62.221,52.523 IC4.3@62.221,53.793
  L4-BOT w0.2: v1(60.438,50.214) v1(62.219,51.995)
ES7210_SDOUT: IC1.7 U2.68 | length 64
  L1-TOP w0.2: v1(48.726,15) 49.04,14.686 U2.68@49.04,12.082 ; v1(49.326,27.55) 49.526,27.35 59.847,27.35 v1(59.851,27.355) ; v1(70.288,55.819) 70.752,55.355 IC1.7@71.846,55.355
  L2-GND w0.17: v1(59.985,40.642) 59.985,42.148 63.49,45.653 63.49,48.61 64.118,49.238 64.118,52.162 67.774,55.819 v1(70.288,55.819)
  L4-BOT w0.2: v1(48.726,15) 48.224,15.502 48.224,17.051 49.673,18.5 49.673,27.203 v1(49.326,27.55) ; v1@59.985,27.488 v1(59.851,27.355) 59.851,27.369 59.018,28.202 59.018,38.629 59.93,39.542 59.93,40.588 v1(59.985,40.642)
ES_I2C_SCL: C50.2 CN3.2 R10.1 R31.2 R32.1 R35.1 U2.12 | length 119.8
  L1-TOP w0.17: v1(52.416,28.95) 61.126,28.95 62.624,27.452 U2.12@65.72,27.452 67.442,27.452 C50.2@67.744,27.754 67.429,28.069 67.429,28.446 67.201,28.674 v1(67.201,28.75)
  L1-TOP w0.2: R31.2@32.226,46.863 32.205,46.841 R32.1@32.205,45.274 31.426,44.495 31.426,41.45 32.714,40.162 40.438,40.162 42.326,42.05 45.301,42.05 ; R35.1@44.246,48.036 45.859,46.423 ; v1(47.18,41.916) 47.18,41.996 47.126,42.05 45.301,42.05 ; v1(51.369,51.023) 51.369,51.331 51.02,51.681 50.585,51.681 49.426,50.522 49.426,48.925 46.925,46.423 45.859,46.423 ; v1(66.628,40.625) 66.675,40.673 67.149,40.673 70.607,44.131 v1(70.607,44.537) ; R10.1@76.528,59.617 v1(76.528,60.3) ; 45.301,42.05 46.76,43.509 46.76,45.523 45.859,46.423
  L4-BOT w0.17: v1(47.18,41.916) 47.18,40.044 52.416,34.808 v1(52.416,28.95) ; v1(66.628,40.625) 65.411,39.408 65.411,29.665 66.326,28.75 v1(67.201,28.75)
  L4-BOT w0.2: CN3.2@46.326,57.48 46.326,57.23 46.626,56.93 46.652,56.93 47.052,56.53 47.302,56.53 51.444,52.388 51.444,51.648 ; v1(51.369,51.023) 51.443,51.097 51.443,51.647 ; v1(70.607,44.537) 76.736,50.666 76.736,56.808 76.026,57.519 76.026,59.799 v1(76.528,60.3)
ES_I2C_SDA: C49.2 CN3.1 IC1.19 R33.2 R34.1 R36.1 U2.11 | length 114.5
  L1-TOP w0.17: v1(52.926,26.65) 53.394,26.182 v1(64.304,26.182) ; U2.11@65.72,26.182 67.648,26.182 C49.2@67.744,26.086
  L1-TOP w0.2: R33.2@32.21,42.119 32.21,43.644 R34.1@32.216,43.65 32.222,43.644 32.632,43.644 35.698,40.578 40.254,40.578 42.126,42.45 45.135,42.45 46.345,43.661 46.345,45.188 ; R36.1@44.265,46.489 45.045,46.489 46.345,45.188 ; v1(46.027,44.87) 46.345,45.188 ; v1(47.515,43.8) 47.359,43.8 47.226,43.933 47.226,46.05 49.826,48.65 49.826,50.179 v1(50.721,51.074) ; v1(64.304,26.182) U2.11@65.72,26.182 ; v1(66.522,41.268) 66.522,41.261 66.819,41.261 69.766,44.208 v1(69.766,44.786) ; IC1.19@74.846,55.355 75.31,55.355 75.569,55.355 v1(76.151,55.937)
  L4-BOT w0.17: v1(47.515,43.8) 47.712,43.8 49.793,41.72 49.793,38.205 52.926,35.072 v1(52.926,26.65)
  L4-BOT w0.2: CN3.1@45.076,57.48 45.284,57.272 45.284,56.749 45.502,56.53 46.486,56.53 46.886,56.13 47.136,56.13 50.802,52.464 50.802,51.699 50.797,51.694 50.797,51.15 v1(50.721,51.074) ; v1(46.027,44.87) 46.445,44.87 v1(47.515,43.8) ; v1(64.304,26.182) 63.867,26.619 63.867,35.028 64.526,35.687 64.526,39.266 v1@66.521,41.261 ; v1(69.766,44.786) 76.151,51.171 v1(76.151,55.937)
ESP_3V3: "Camera CSI interface1.15" "Display DSI interface1.14" "Display DSI interface1.15" C32.2 C33.2 C34.2 C35.2 CN3.3 R5.2 R29.1 R30.1 R31.1 R33.1 R37.2 R50.1 | length 166.6
  L1-TOP w0.8: v2(26.166,44.32) 26.166,43.69 27.737,42.119 R33.1@30.703,42.119 ; v2(30.717,47.691) 30.717,46.866 R31.1@30.72,46.863 ; v3(33.026,13.75) 33.204,13.928 R50.1@34.265,13.928
  L3-GND/PWR w0.8: v3(25.249,46.9) 26.126,46.9 27.946,48.72 30.556,48.72 ; v2(30.717,47.691) 30.717,47.776 31.661,48.72 ; v3(30.873,61.033) 29.566,59.727 21.693,59.727 19.404,57.438 ; v3(33.026,13.75) 33.083,13.693 33.083,13.189 33.176,13.097 33.176,9.9 31.087,7.811 20.665,7.811 17.905,5.05 15.728,5.05 12.966,7.812 12.966,28.496 12.34,29.121 12.34,52.614 17.164,57.438 19.404,57.438 ; v2(42.046,44.87) 42.046,45.74 39.066,48.72 31.661,48.72 ; 19.404,57.438 21.838,57.438 30.556,48.72 ; 30.556,48.72 31.661,48.72
  L4-BOT w0.8: v3(25.249,46.9) C33.2@25.249,44.263 26.109,44.263 v2(26.166,44.32) ; v2(30.717,47.691) 30.843,47.564 30.843,46.505 R29.1@30.847,46.502 R30.1@30.847,44.942 ; R5.2@30.873,59.67 v3(30.873,61.033) ; v3@31.257,61.195 31.313,61.25 36.826,61.25 39.946,58.13 43.825,58.13 44.176,58.481 44.176,59.3 44.726,59.85 46.706,59.85 47.526,59.03 47.526,57.53 CN3.3@47.576,57.48
ESP_LDO_VO4: R20.1 R23.1 U2.58 | length 36.3
  L1-TOP w0.5: U2.58@38.72,16.082 38.845,16.207 39.228,16.207 41.171,18.15 51.732,18.15 v2(51.816,18.234)
  L4-BOT w0.5: v2(51.816,18.234) 51.816,24.24 52.226,24.65 61.526,24.65 62.226,23.95 62.226,22.286 61.426,21.486 R20.1@58.771,21.486
ESP_USB_N: D6.1 U2.39 USB1.A7 USB1.B7 | length 48.4
  L1-TOP w0.155: USB1.A7@6.934,32.431 6.995,32.37 7.129,32.504 7.669,32.504 7.832,32.666 7.832,33.196 7.827,33.202 7.597,33.431 USB1.B7@6.934,33.431 ; USB1.A7@6.995,32.36 11.956,32.36 D6.1@12.296,32.7 12.617,32.379 12.896,32.379 14.791,34.275 14.791,38.194 17.079,40.481 19.953,40.481 21.714,38.72 21.714,38.366 v1(21.86,38.22) ; v1(41.14,37.36) 40.995,37.506 40.995,38.627 U2.39@41.45,39.082
  L4-BOT w0.155: v1(21.86,38.22) 21.714,38.074 21.714,37.594 22.948,36.36 37.993,36.36 39.09,37.456 39.851,38.218 40.637,38.218 40.995,37.86 40.995,37.506 v1(41.14,37.36)
ESP_USB_P: D5.1 U2.40 USB1.A6 USB1.B6 | length 48.3
  L1-TOP w0.155: USB1.A6@6.934,32.931 6.187,32.931 6.037,32.781 6.037,32.081 6.187,31.931 USB1.B6@6.934,31.931 7.005,32.002 12.014,32.002 D5.1@12.316,31.7 12.637,32.021 13.044,32.021 14.334,33.311 15.15,34.126 15.15,38.046 17.227,40.123 17.477,40.123 17.554,40.123 17.754,39.923 18.154,39.923 18.354,40.123 18.494,40.123 18.649,40.123 18.726,40.123 18.926,39.923 19.326,39.923 19.526,40.123 19.805,40.123 20.172,39.755 21.356,38.572 21.356,38.366 v1(21.21,38.22) ; U2.40@40.18,39.082 40.636,38.627 40.636,37.506 v1(40.49,37.36)
  L4-BOT w0.155: v1(21.21,38.22) 21.356,38.074 21.356,37.445 22.8,36.002 38.142,36.002 39.448,37.308 39.999,37.859 40.488,37.859 40.636,37.711 40.636,37.506 v1(40.49,37.36)